# Altium PCB IMX6.PcbDoc
Units mil, origin at the board's own origin, x right, y up, seen from the top; angles counter-clockwise.
Board outline 7950 x 5550 mil, 2 copper layers (Top Layer, Bottom Layer), stack 12.8 mil thick; 102 components, 254 nets, 606 pads, 236 vias.
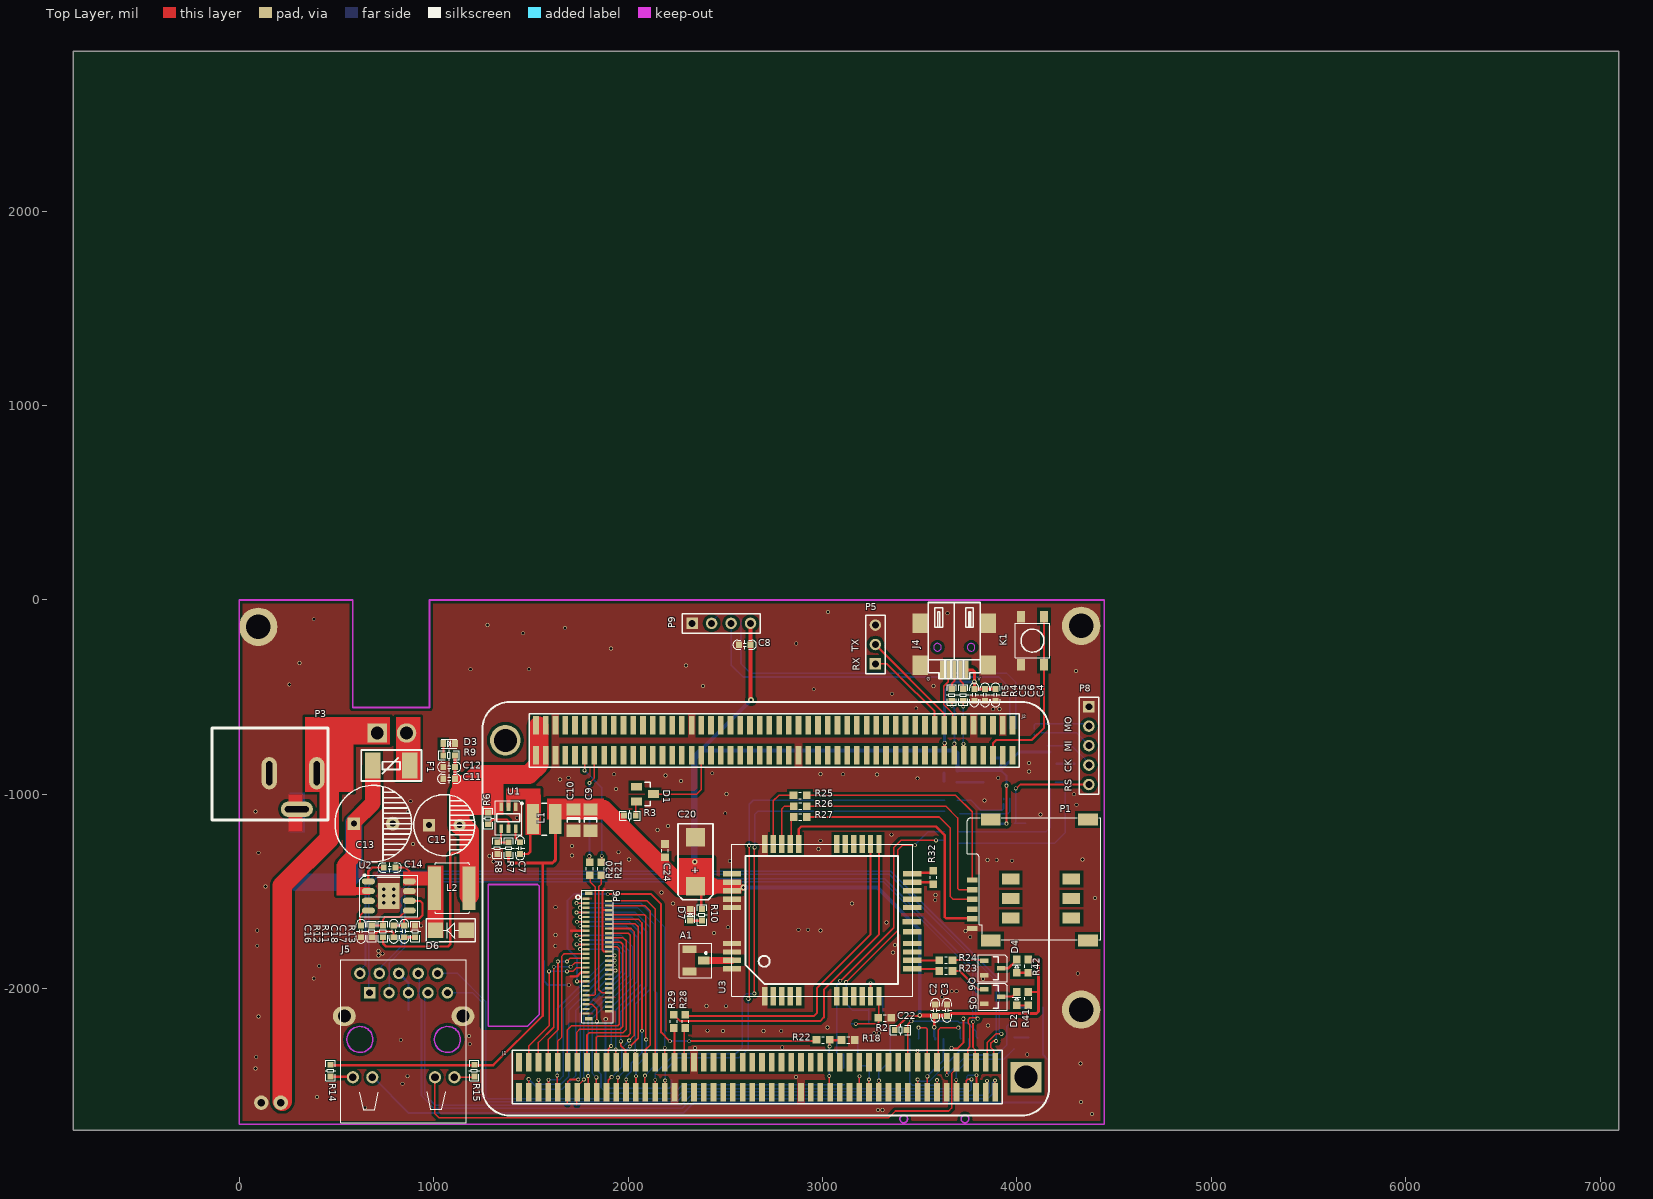
[diagram p0: Top Layer view]
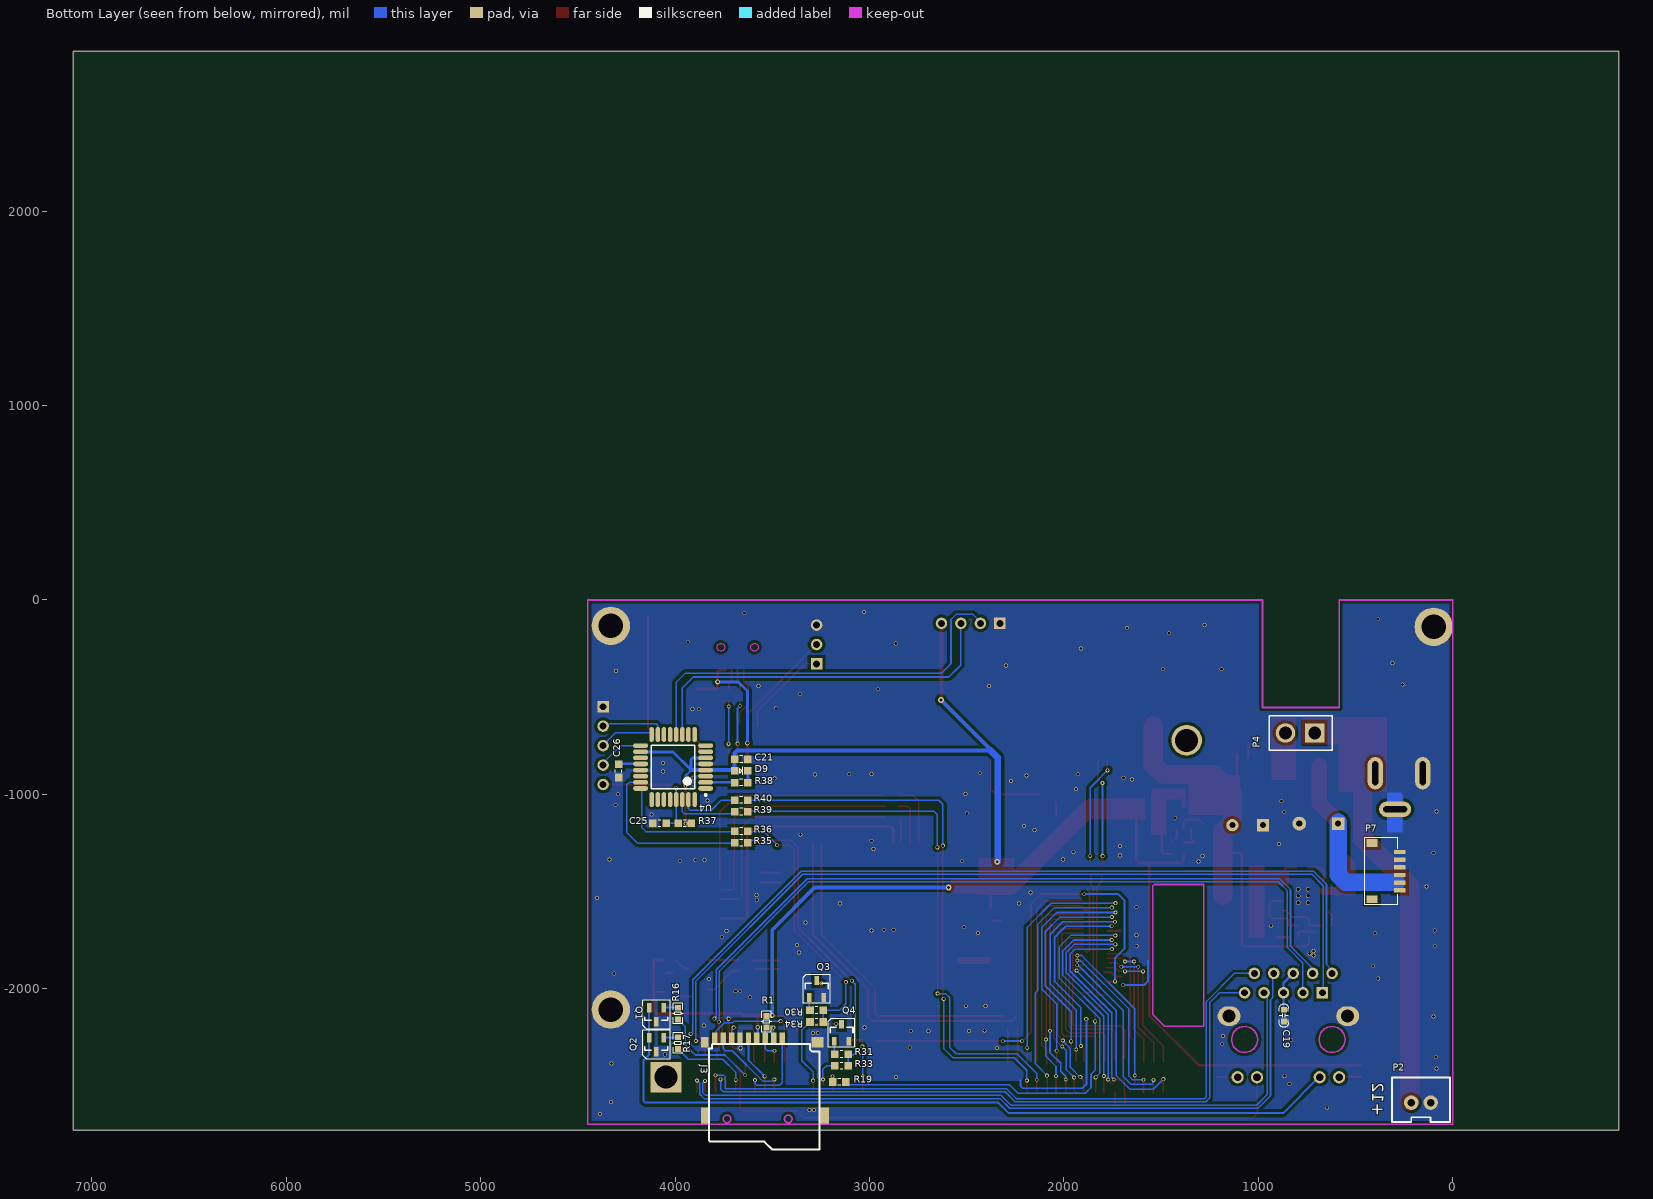
[diagram p1: Bottom Layer view, seen from below]

## Layer stack, top to bottom
Top Layer: signal copper 1.4
Dielectric: core 10, FR-4, Dk 4.2
Bottom Layer: signal copper 1.4

## Board outline
-854,2823 7096,2823 7096,-2727 -854,-2727

## Design rules (kind name [scope] priority, off if disabled: settings)
Clearance [All] p1 off: gap=15
ComponentClearance [All] p1 off: gap=0 collisioncheckmode=3 verticalgap=0
DiffPairsRouting [All] p1: maxlimit=10 minlimit=8 mostfreqgap=8 maxuncoupledlength=500
HoleSize [All] p1: absolutevalues=TRUE maxlimit=300 minlimit=1 maxpercent=80.000 minpercent=20.000
PlaneConnect [All] p1: planeconnectstyle=Direct reliefexpansion=20 reliefentries=4 reliefconductorwidth=12 reliefairgap=10
PolygonConnect [All] p1: connectstyle=Direct reliefconductorwidth=15 reliefentries=4 polygonreliefangle="90 Angle"
RoutingVias [All] p1: holewidth=12 width=20 viastyle="Through Hole" minholewidth=8 minwidth=16 maxholewidth=200 maxwidth=300
SolderMaskExpansion [All] p1: expansion=4
TestPointUsage FabricationTestPointUsage [All] p1: valid=0 allowmultiple=FALSE
Testpoint FabricationTestpoint [(IsPad And (OnTopLayer Or OnBottomLayer))] p1: side=3 testpointundercomponent=TRUE minsize=40 maxsize=100 preferedsize=60 minholesize=0 maxholesize=40 preferedholesize=32 testpointgrid=1 style=297 order=0123456789
Width [All] p1: maxlimit=200 minlimit=6 preferedwidth=10 minimp=50.000000 maximp=50.000000 favimp=50.000000
15 further rules are at their usual default settings.

## Classes and differential pairs
component class 9.RGB&TOUCH: P6 R18 R19 R20 R21 R22
component class 0.CONNECTOR: C2 C3 C4 C5 C6 D1 J1 J2 J3 J4 K1 R1 R2 R3 R4 R5 R33 R34
component class 1.POWER: C7 C8 C9 C10 C11 C12 C13 C14 C15 C16 C17 C18 C86 C87 C88 D3 D6 D7 F1 L1 L2 L11 P2 P3 P4 P7 R6 R7 R8 R9 R10 R11 R12 R13 R58 R59 U1 U2
component class 2.ETH: A1 C19 C20 C21 C22 C24 C25 C26 D2 D4 D9 J5 P1 P8 P9 Q1 Q2 Q3 Q4 Q5 Q6 R14 R15 R16 R17 R23 R24 R25 R26 R27 R28 R29 R30 R31 R32 R35 R36 R37 R38 R39 R40 R41 R42 U3 U4
component class 3.UART: C55 C56 D16 D17 D18 D19 D20 D21 P5
differential pair TRX0: +TRX0_P -TRX0_N
differential pair TRX1: +TRX1_P -TRX1_N
differential pair TRX2: +TRX2_P -TRX2_N
differential pair TRX3: +TRX3_P -TRX3_N
differential pair USB_OTG_D: +USB_OTG_D_P -USB_OTG_D_N

## Components (designator, comment, footprint, x,y, rotation, side; value= is the part's Value field where it differs from the comment)
A1 "IPEX" IPEX 2344,-1853 r0 top
C2 "22uF" 0603C 3580,-2110 r0 top
C3 "0.1uF" 0603C 3640,-2110 r0 top
C4 "0.1uF" 0603C 3890,-488 r180 top
C5 "22uF" 0603C 3781,-488 r180 top
C6 "22uF" 0603C 3836,-488 r180 top
C7 "0.1uF" 0603C 1445,-1276 r180 top
C8 "0.1uF" 0603C 2600,-230 r270 top
C9 "47uF" C1206 1807,-1132 r270 top
C10 "47uF" C1206 1719,-1132 r270 top
C11 "10uF" 0603C 1080,-919 r270 top
C12 "0.1uF" 0603C 1080,-859 r270 top
C13 "Cap Pol3" C10x5 790,-1150 r180 top
C14 "Cap" 0603C 774,-1376 r270 top
C15 "Cap Pol3" C8x4 1134,-1158 r180 top
C16 "Cap" 0603C 627,-1704 r0 top
C17 "Cap" 0603C 849,-1704 r180 top
C18 "Cap" 0603C 795,-1704 r180 top
C19 "0.1uF" 0603C 869,-2137 r180 bottom
C20 "Cap Pol3" C7343 2347,-1346 r90 top
C21 "Cap" 0603 3660,-819 r0 bottom
C22 "Cap" 0603 3320,-2149 r0 top
C24 "104" 0603 2190,-1289 r270 top
C25 "Cap" 0603 4080,-1149 r0 bottom
C26 "Cap" 0603 4290,-879 r270 bottom
D1 "BAT54C" SOT-23 2030,-1039 r180 top
D2 "WORK" 0603-LED 3999,-2050 r90 top
D3 "发光二极管" 0603D 1080,-739 r270 top
D4 "LINK" 0603-LED 3999,-1883 r90 top
D6 "SS54" SMA 1089,-1699 r180 top
D7 "发光二极管" 0603D 2320,-1619 r0 top
D9 "BLUE" 0603-LED 3660,-879 r180 bottom
F1 "Fuse Thermal" 1812F 878,-852 r180 top
J1 "CON50X2" IDC50X2-1.27MM_SMT 2664.2,-2453.94 r0 top locked
J2 "CON50X2" IDC50X2-1.27MM_SMT 2752,-721.66 r0 top locked
J3 "TF-CARD" TF-CARD 3507,-2327 r90 bottom
J4 "USB_AB" "MINI USB B" 3678,-357 r180 top
J5 "48F-01GY2DPL2NL" RJ45C-48F-01GY2DPL2NL 621,-1920 r0 top locked
K1 "KEY" SS-SPB-4.5 4080,-209 r90 top
L1 "3.3uH" L4030 1569,-1127 r180 top
L2 "Inductor" L-6045 1005,-1482 r0 top
P1 "MircoSIM" "Micro SIM" 4280,-1635 r90 top
P2 "Header 2" XH2.54-2P 214,-2585 r180 bottom
P3 "Header 2" DC005 155,-891 r0 top
P4 "Header 2" HDR1X2 721,-683 r0 bottom
P5 "Header 3" HDR1X3 3272,-329 r90 top
P6 "FPC-51PIN" FH26-51S-0.3SHW 1786,-1536 r90 top
P7 "DLP-PW" SH1.0-6P 273,-1493 r90 bottom
P8 "ISP" HDR1X5 4370,-549 r270 top
P9 "CSB" HDR1X4 2330,-120 r0 top locked
Q1 "9012" SOT-23-PMOS 4096,-2133 r270 bottom
Q2 "9012" SOT-23-PMOS 4096,-2287 r270 bottom
Q3 "NPN" SOT-23-NPN 3272,-2000 r180 bottom
Q4 "NPN" SOT-23-NPN 3144,-2226 r180 bottom
Q5 "NPN" SOT-23-NPN 3876,-2040 r270 top
Q6 "NPN" SOT-23-NPN 3876,-1893 r270 top
R1 "10K" 0603R 3530,-2169 r0 bottom
R2 "10K" 0603R 3402,-2211 r270 top
R3 "10K" 0603R 2010,-1109 r270 top
R4 "33R" 0603R 3724,-488 r0 top
R5 "33R" 0603R 3665,-488 r0 top
R6 "10K" 0603R 1281,-1123 r0 top
R7 "33K" 0603R 1386,-1276 r180 top
R8 "10K" 0603R 1328,-1276 r180 top
R9 "Res1" 0603R 1080,-799 r270 top
R10 "1K" 0603R 2380,-1619 r180 top
R11 "Res Semi" 0603R 740,-1704 r0 top
R12 "Res Semi" 0603R 682,-1704 r180 top
R13 "Res Semi" 0603R 905,-1704 r0 top
R14 "1K" 0603R 470,-2420 r180 top
R15 "1K" 0603R 1210,-2420 r180 top
R16 "4.7K" 0603R 3985,-2127 r180 bottom
R17 "4.7K" 0603R 3985,-2279 r180 bottom
R18 "47R" 0603 3003,-2262 r180 top
R19 "47R" 0603 3156,-2479 r180 bottom
R20 "47R" 0603 1803,-1382 r270 top
R21 "47R" 0603 1862,-1382 r270 top
R22 "100K" 0603 3132,-2263 r180 top
R23 "Res1" 0603 3635,-1908 r0 top
R24 "Res1" 0603 3635,-1852 r0 top
R25 "Res1" 0603 2885,-1005 r180 top
R26 "Res1" 0603 2886,-1060 r180 top
R27 "Res1" 0603 2886,-1116 r180 top
R28 "Res1" 0603 2295,-2167 r270 top
R29 "Res1" 0603 2235,-2167 r270 top
R30 "Res1" 0603 3272,-2110 r180 bottom
R31 "Res1" 0603 3144,-2336 r180 bottom
R32 "Res1" 0603 3570,-1427 r270 top
R33 "Res1" 0603 3144,-2396 r180 bottom
R34 "Res1" 0603 3272,-2170 r180 bottom
R35 "Res1" 0603 3660,-1249 r0 bottom
R36 "Res1" 0603 3660,-1189 r0 bottom
R37 "Res1" 0603 3950,-1149 r180 bottom
R38 "1K" 0603 3660,-939 r180 bottom
R39 "Res1" 0603 3660,-1089 r180 bottom
R40 "Res1" 0603 3660,-1029 r180 bottom
R41 "Res1" 0603 4058,-2050 r270 top
R42 "Res1" 0603 4058,-1883 r270 top
U1 "TPS562201" SOT23-6-DC 1385,-1120 r270 top
U2 "TPS54331" SOP8-POW 770,-1522 r0 top
U3 "G3524" G3524 2763,-1623 r90 top
U4 "ATmega48PA" 32A_M 4010,-859 r0 bottom

## Footprints (in the part's own frame and the unit in brackets; to place one, negate y for a bottom-side part, rotate by r counter-clockwise, add the part's x,y. Pads: shape width x height; smd on the part's side, far side on the other; paste and mask are expansions set on the pad)
32A_M [mm] "32-Pin Thin Quad Flat Pack 0.8 mm Pitch, IPC Low Density"
  oval 1.95x0.6 smd: 1(-4.25,2.8) 2(-4.25,2) 3(-4.25,1.2) 4(-4.25,0.4) 5(-4.25,-0.4) 6(-4.25,-1.2) 7(-4.25,-2) 8(-4.25,-2.8) 17(4.25,-2.8) 18(4.25,-2) 19(4.25,-1.2) 20(4.25,-0.4) 21(4.25,0.4) 22(4.25,1.2) 23(4.25,2) 24(4.25,2.8)
  oval 0.6x1.95 smd: 9(-2.8,-4.25) 10(-2,-4.25) 11(-1.2,-4.25) 12(-0.4,-4.25) 13(0.4,-4.25) 14(1.2,-4.25) 15(2,-4.25) 16(2.8,-4.25) 25(2.8,4.25) 26(2,4.25) 27(1.2,4.25) 28(0.4,4.25) 29(-0.4,4.25) 30(-1.2,4.25) 31(-2,4.25) 32(-2.8,4.25)
  silkscreen extent -4.37,-2.85 2.85,3.77, body extent -3.5,-3.5 3.5,3.5, height 1.2
0603 [mm]
  rect 1x1 smd: 1(-0.864,0) 2(0.864,0)
  silkscreen extent -0.18,-0.43 0.18,0.43
0603-LED [mm]
  rect 1x1 smd: 1(-0.864,0) 2(0.864,0)
  silkscreen extent -0.18,-0.51 0.18,0.56
0603C [mil]
  rect 31.5x30 smd: 1(0,30) 2(0,-30)
  silkscreen extent -24,-60 24,60
0603D [mil]
  rect 35.43x30 smd: A(0,-30) K(0,30)
  silkscreen extent -24,-40 24,39
0603R [mil]
  rect 31.5x30 smd: 1(0,30) 2(0,-30)
  silkscreen extent -28,-53 28,53
1812F [mm]
  rect 2x3.4 smd: 1(0,0) 2(4.85,0)
  silkscreen extent -1.5,-2.03 6.35,2.03
C8x4 [mm]
  round 1.6 hole 0.8: 1(0,0)
  rect 1.6x1.6 hole 0.8: 2(4,0)
  silkscreen extent -2,-4 6,4
C10x5 [mm]
  round 1.8 hole 0.8: 1(0,0)
  rect 1.651x1.651 hole 0.8: 2(5.08,0)
  silkscreen extent -2.46,-5 7.54,5
C1206 [mm] "Chip Capacitor; Body 3.2 x 1.6 mm (LxW typ)"
  rect 1.6x1.8 smd: 1(-1.4,0) 2(1.4,0)
  silkscreen extent -0.3,-0.8 0.3,0.8
C7343 [mm] "Molded Capacitor, 2-Leads, Body 7.3x4.3mm, IPC Medium Density"
  rect 2.45x2.5 smd: 1(-3.2,0) 2(3.2,0)
  silkscreen extent -4.95,-2.29 4.95,2.29, body extent -3.75,-2.25 3.75,2.25, height 4.3
DC005 [mm]
  oval 2x4.2 hole 0.8 slot 3.1 at 90 deg: 1(6.2,0) 2(0,0)
  oval 4.2x2 hole 0.8 slot 3.1 at 0 deg: 3(3.6,-4.7)
  silkscreen extent -7.49,-6.1 7.7,5.89
FH26-51S-0.3SHW [mm]
  rect 0.45x1 smd: 0(-15.7,-0.3) 0(0.7,-0.3)
  rect 0.3x0.95 smd: 1(0,0.05) 2(-0.3,-2.91) 3(-0.6,0.05) 4(-0.9,-2.91) 5(-1.2,0.05) 6(-1.5,-2.91) 7(-1.8,0.05) 8(-2.1,-2.91) 9(-2.4,0.05) 10(-2.7,-2.91) 11(-3,0.05) 12(-3.3,-2.91) 13(-3.6,0.05) 14(-3.9,-2.91) 15(-4.2,0.05) 16(-4.5,-2.91) 17(-4.8,0.05) 18(-5.1,-2.91) 19(-5.4,0.05) 20(-5.7,-2.91) 21(-6,0.05) 22(-6.3,-2.91) 23(-6.6,0.05) 24(-6.9,-2.91) 25(-7.2,0.05) 26(-7.5,-2.91) 27(-7.8,0.05) 28(-8.1,-2.91) 29(-8.4,0.05) 30(-8.7,-2.91) 31(-9,0.05) 32(-9.3,-2.91) 33(-9.6,0.05) 34(-9.9,-2.91) 35(-10.2,0.05) 36(-10.5,-2.91) 37(-10.8,0.05) 38(-11.1,-2.91) 39(-11.4,0.05) 40(-11.7,-2.91) 41(-12,0.05) 42(-12.3,-2.91) 43(-12.6,0.05) 44(-12.9,-2.91) 45(-13.2,0.05) 46(-13.5,-2.91) 47(-13.8,0.05) 48(-14.1,-2.91) 49(-14.4,0.05) 50(-14.7,-2.91) 51(-15,0.05)
  silkscreen extent -16.2,-3.5 1.1,1.38
G3524 [mm]
  rect 2.4x0.7 smd: 1(-10.55,1.5) 2(-10.55,0.4) 3(-10.55,-0.7) 4(-10.55,-1.8) 5(-10.55,-2.9) 6(-10.55,-7.9) 7(-10.55,-9) 8(-10.55,-10.1) 9(-10.55,-11.2) 10(-10.55,-12.3) 11(-10.55,-13.4) 21(9.35,-13.4) 22(9.35,-12.3) 23(9.35,-11.2) 24(9.35,-10.1) 25(9.35,-9) 26(9.35,-7.9) 27(9.35,-2.9) 28(9.35,-1.8) 29(9.35,-0.7) 30(9.35,0.4) 31(9.35,1.5)
  rect 0.7x2.4 smd: 12(-6.95,-17.75) 13(-5.85,-17.75) 14(-4.75,-17.75) 15(-3.65,-17.75) 16(1.05,-17.75) 17(2.15,-17.75) 18(3.25,-17.75) 19(4.35,-17.75) 20(5.45,-17.75) 32(5.45,5.8) 33(4.35,5.8) 34(3.25,5.8) 35(2.15,5.8) 36(1.05,5.8) 37(-3.65,5.8) 38(-4.75,5.8) 39(-5.85,5.8) 40(-6.95,5.8) 41(-2.1,-17.75) 42(-0.8,-17.7)
  silkscreen extent -10.55,-17.8 9.35,5.8
HDR1X2 [mil] "Connector; Header; 2 Position"
  rect 100x100 hole 65: 1(-10,1)
  round 100 hole 65: 2(140,1)
  silkscreen extent -100,-88 224,89
HDR1X3 [mm] "Connector; Header; 3 Position"
  rect 1.5x1.5 hole 0.9: 1(0,0)
  round 1.5 hole 0.9: 2(2.54,0) 3(5.08,0)
  silkscreen extent -1.27,-1.27 6.35,1.27
HDR1X4 [mm] "Connector; Header; 4 Position"
  rect 1.5x1.5 hole 0.9: 1(0,0)
  round 1.5 hole 0.9: 2(2.54,0) 3(5.08,0) 4(7.62,0)
  silkscreen extent -1.27,-1.27 8.89,1.27
HDR1X5 [mm] "Connector; Header; 5 Position"
  rect 1.5x1.5 hole 0.9: 1(0,0)
  round 1.5 hole 0.9: 2(2.54,0) 3(5.08,0) 4(7.62,0) 5(10.16,0)
  silkscreen extent -1.27,-1.27 11.43,1.27
IDC50X2-1.27MM_SMT [mm]
  rect 0.74x2.4 smd: 1(-31.115,-1.95) 2(-31.115,1.95) 3(-29.845,-1.95) 4(-29.845,1.95) 5(-28.575,-1.95) 6(-28.575,1.95) 7(-27.305,-1.95) 8(-27.305,1.95) 9(-26.035,-1.95) 10(-26.035,1.95) 11(-24.765,-1.95) 12(-24.765,1.95) 13(-23.495,-1.95) 14(-23.495,1.95) 15(-22.225,-1.95) 16(-22.225,1.95) 17(-20.955,-1.95) 18(-20.955,1.95) 19(-19.685,-1.95) 20(-19.685,1.95) 21(-18.415,-1.95) 22(-18.415,1.95) 23(-17.145,-1.95) 24(-17.145,1.95) 25(-15.875,-1.95) 26(-15.875,1.95) 27(-14.605,-1.95) 28(-14.605,1.95) 29(-13.335,-1.95) 30(-13.335,1.95) 31(-12.065,-1.95) 32(-12.065,1.95) 33(-10.795,-1.95) 34(-10.795,1.95) 35(-9.525,-1.95) 36(-9.525,1.95) 37(-8.255,-1.95) 38(-8.255,1.95) 39(-6.985,-1.95) 40(-6.985,1.95) 41(-5.715,-1.95) 42(-5.715,1.95) 43(-4.445,-1.95) 44(-4.445,1.95) 45(-3.175,-1.95) 46(-3.175,1.95) 47(-1.905,-1.95) 48(-1.905,1.95) 49(-0.635,-1.95) 50(-0.635,1.95) 51(0.635,-1.95) 52(0.635,1.95) 53(1.905,-1.95) 54(1.905,1.95) 55(3.175,-1.95) 56(3.175,1.95) 57(4.445,-1.95) 58(4.445,1.95) 59(5.715,-1.95) 60(5.715,1.95) 61(6.985,-1.95) 62(6.985,1.95) 63(8.255,-1.95) 64(8.255,1.95) 65(9.525,-1.95) 66(9.525,1.95) 67(10.795,-1.95) 68(10.795,1.95) 69(12.065,-1.95) 70(12.065,1.95) 71(13.335,-1.95) 72(13.335,1.95) 73(14.605,-1.95) 74(14.605,1.95) 75(15.875,-1.95) 76(15.875,1.95) 77(17.145,-1.95) 78(17.145,1.95) 79(18.415,-1.95) 80(18.415,1.95) 81(19.685,-1.95) 82(19.685,1.95) 83(20.955,-1.95) 84(20.955,1.95) 85(22.225,-1.95) 86(22.225,1.95) 87(23.495,-1.95) 88(23.495,1.95) 89(24.765,-1.95) 90(24.765,1.95) 91(26.035,-1.95) 92(26.035,1.95) 93(27.305,-1.95) 94(27.305,1.95) 95(28.575,-1.95) 96(28.575,1.95) 97(29.845,-1.95) 98(29.845,1.95) 99(31.115,-1.95) 100(31.115,1.95)
  silkscreen extent -32,-3.5 32,3.5
IPEX [mil] "SOT23, 3-Leads, Body 3.0x2.6mm (max), Pitch 0.95mm, IPC Medium Density"
  rect 59.06x41.34 smd: 1(46.5,-0.5)
  rect 70.87x39.37 smd: 2(-28.5,57.5) 3(-28.5,-57.5)
  silkscreen extent -80,-88 86,88
L4030 [mm]
  rect 1.6x3.9 smd: 1(-1.45,0) 2(1.45,0)
  silkscreen extent -0.35,-2.1 0.35,2.1
L-6045 [mm]
  rect 1.7x5.7 smd: 1(0,0) 2(4.5,0)
  silkscreen extent 0,-3.3 4.57,3.3
"Micro SIM" [mm]
  rect 1.55x2.6 smd: 0(-2.95,10.53) 0(-2.95,-2.15) 0(12.85,10.53) 0(12.85,-2.15)
  rect 1.4x2.3 smd: 0(0,7.92) 0(0,0) 0(2.54,7.92) 0(2.54,0) 0(5.08,7.92) 0(5.08,0)
  rect 0.7x1.35 smd: 1(-0.12,12.955) 2(2.42,12.955) 3(4.96,12.955) 5(-1.39,12.955) 6(1.15,12.955) 7(3.69,12.955)
  silkscreen extent -2.82,-3.82 13.05,13.58
"MINI USB B" [mm]
  rect 0.5x2.3 smd: 1(-1.6,0) 2(-0.8,0) 3(0,0) 4(0.8,0) 5(1.6,0)
  rect 2x2.5 smd: 6(4.45,-6.038) 7(4.45,-0.538) 8(-4.45,-0.554) 9(-4.45,-6.038)
  Keep-Out Layer circle w0.1: c2.2,-2.893 r0.5
  Keep-Out Layer circle w0.1: c-2.2,-2.893 r0.5
  silkscreen extent -3.4,-8.74 3.4,1.22, body extent -5.32,-8.77 5.38,0.43, height 3.95
RJ45C-48F-01GY2DPL2NL [mm]
  round 1.5 hole 0.9: 1(0,0) 3(2.54,0) 4(3.81,-2.54) 5(5.08,0) 6(6.35,-2.54) 7(7.62,0) 8(8.89,-2.54) 9(10.16,0) 10(11.43,-2.54)
  rect 1.5x1.5 hole 0.9: 2(1.27,-2.54)
  round 1.6 hole 1: 11(-0.915,-13.565) 12(1.625,-13.565) 13(9.805,-13.565) 14(12.345,-13.565)
  oval 3x2.54 hole 1.7: 15(-2.035,-5.59) 16(13.465,-5.59)
  Keep-Out Layer circle w0.178: c0,-8.64 r1.7
  Keep-Out Layer circle w0.178: c11.43,-8.64 r1.7
  silkscreen extent -2.48,-19.54 13.92,1.77
SH1.0-6P [mm]
  rect 1x1.5 smd: 0(-1.175,3.63) 0(6.175,3.63)
  rect 0.55x1.55 smd: 1(0,0) 2(1,0) 3(2,0) 4(3,0) 5(4,0) 6(5,0)
  silkscreen extent -1.88,0.25 6.88,4.57
SMA [mm]
  rect 2x2 smd: A(-2,0) K(2,0)
  silkscreen extent -3.2,-1.5 3.2,1.5
SOP8-POW [mm]
  oval 1.7x0.8 smd: 1(-2.675,1.905) 2(-2.675,0.635) 3(-2.675,-0.635) 4(-2.675,-1.905) 5(2.675,-1.905) 6(2.675,-0.635) 7(2.675,0.635) 8(2.675,1.905)
  rect 2.8x3.4 smd: 9(0,0)
  silkscreen extent -3.78,-2.7 3.77,2.82
SOT23-6-DC [mm]
  rect 1.1x0.5 smd: 1(-1.45,0.95) 2(-1.45,0) 3(-1.45,-0.95) 4(1.45,-0.95) 5(1.45,0) 6(1.45,0.95)
  silkscreen extent -2.25,-1.75 2.25,1.88, body extent -0.87,-1.5 0.87,1.5, height 1.1
SOT-23 [mil]
  rect 55x40 smd: 1(-14.05,-78.06) 2(-14.05,-2.06) 3(-101.05,-41.06)
  silkscreen extent -85,-101 -56,20
SOT-23-NPN [mm]
  rect 0.6x1.143 smd: 1(0.95,-1.108) 2(-0.95,-1.108) 3(0,1.108)
  silkscreen extent -1.75,-1.89 1.75,1.87, body extent -1.5,-0.66 1.5,0.74, height 1.1
SOT-23-PMOS [mm]
  rect 1.25x0.6 smd: 1(-0.925,0.95) 2(-0.925,-0.95) 3(0.925,0)
  silkscreen extent -1.91,-1.78 1.91,1.78, body extent -0.7,-1.5 0.7,1.5, height 1.1
SS-SPB-4.5 [mm]
  rect 1.5x1 smd: 1(-3.15,1.5) 2(3.15,1.5) 3(3.15,-1.5) 4(-3.15,-1.5)
  silkscreen extent -2.25,-2.25 2.25,2.25
TF-CARD [mm]
  rect 1.6x0.7 smd: 1(1.82,-1.466) 2(1.82,-0.366) 3(1.82,0.734) 4(1.82,1.834) 5(1.82,2.934) 6(1.82,4.034) 7(1.82,5.134) 8(1.82,6.234) 9(1.82,7.334)
  rect 1.4x1 smd: 10(1.32,8.634)
  rect 2.2x1.2 smd: 11(-8.28,8.534) 12(-8.28,-6.966)
  rect 1.4x1.6 smd: 13(1.32,-6.066)
  Keep-Out Layer circle w0.203: c-8.68,5.734 r0.5
  Keep-Out Layer circle w0.203: c-8.68,-2.266 r0.5
  silkscreen extent -12.7,-6.37 1.12,8.13
XH2.54-2P [mm]
  round 1.9 hole 0.95 paste+0: 1(0,0)
  round 1.9 hole 0.95: 2(2.54,0)
  silkscreen extent -2.54,-2.54 5.08,3.3

## Part data
C2 C3 C4 C5 C6 C7 C8 C9 C10 C11 C12 C19: library part 电容, "电容"
C13 C15 C20: "Polarized Capacitor (Surface Mount)"
C14 C16 C17 C18 C21 C22 C25 C26: "Capacitor"
C24: library part CAP
D1: "SCHOTTKY DIODE"
D2 D4 D9: library part LED2, "Typical RED, GREEN, YELLOW, AMBER GaAs LED"
D6: library part SS24
F1: "Thermal Fuse"
J1 J2: "ASTRON B2B Connector"
J4: "小USB插痤"
K1: library part 按键, "按键"
L1: library part 功率电感
P2 P3 P4: "Header, 2-Pin"
P5: "Header, 3-Pin"
P7: library part "Header 6", "Header, 6-Pin"
P8: library part "Header 5", "Header, 5-Pin"
P9: library part "Header 4", "Header, 4-Pin"
Q3 Q4 Q5 Q6: library part 2N5551, "NPN General Purpose Amplifier"
R1 R2 R3 R4 R5 R6 R7 R8 R10 R14 R15 R16 R17: library part 电阻, "电阻"
R9 R23 R24 R25 R26 R27 R28 R29 R30 R31 R32 R33 R34 R35 R36 R37 R39 R40 R41 R42: "Resistor"
R11 R12 R13: "Semiconductor Resistor"
R18 R19 R20 R21 R22 R38: library part Res1, "Resistor"
U4: library part ATmega8-16AC, "8-Bit AVR Microcontroller with 8K Bytes of In-System Programmable Flash Memory"

## Free pads (board coordinates)
  round 157.48 hole 118.11: 0(1369.52,-721.66)
  rect 157.48x157.48 hole 118.11: 0(4046.69,-2453.94)
  round 196.85 hole 125.98: 1(4330.71,-2106.45) 1(4330.71,-133) 2(98.42,-137.95)

## Via types
v1: diameter 20, hole 15, Top Layer to Bottom Layer, 128 vias
v2: diameter 20, hole 12, Top Layer to Bottom Layer, 87 vias
v3: diameter 22, hole 18, Top Layer to Bottom Layer, 6 vias
v4: diameter 19, hole 12, Top Layer to Bottom Layer, 3 vias
v5: diameter 22, hole 13, Top Layer to Bottom Layer, 2 vias
v6: diameter 25, hole 14, Top Layer to Bottom Layer, 2 vias
v7: diameter 30, hole 15, Top Layer to Bottom Layer, 2 vias
v8: diameter 19, hole 11, Top Layer to Bottom Layer, 1 vias
v9: diameter 20, hole 11, Top Layer to Bottom Layer, 1 vias
v10: diameter 22, hole 15, Top Layer to Bottom Layer, 1 vias
v11: diameter 30, hole 16, Top Layer to Bottom Layer, 1 vias
v12: diameter 23, hole 13, Top Layer to Bottom Layer, 1 vias
v13: diameter 24, hole 14, Top Layer to Bottom Layer, 1 vias

## Nets (pads, with @x,y where several pads share a name; then routed paths per layer and width w, separated by ;. In a path a pad name is that pad's centre, name@x,y a point inside that pad or via, vN(x,y) a via of type N, cw(c..) or ccw(c..) an arc to the next point about the centre after c; other vN are vias at no path point)
+3.3V: C2.2 C3.2 C8.1 C9.1 C10.1 C20.1 C21.2 C24.2 D9.1 J3.4 L1.1 P9.4 R1.2 R2.2 R3.2 R7.1 R10.2 R14.2 R15.2 R37.2 R41.1 R42.1 U3.33 U3.34 U4.4 U4.6 U4.18 | length 9745.4
  Top Layer w12: R14.2@470,-2392 1307,-2392 1561,-2138 1561,-1354 ; R10.2@2377,-1582.76 C20.1@2377,-1509 ; R2.2@3372,-2214 3372,-2208 3441,-2139 v6@3501,-2139 ; C3.2@3645,-2138 C3.2@3649,-2142 ; v2(3946,-1150) v2(3946,-955) ; R41.1@4054,-2016 4110,-2016
  Top Layer w15: R7.1 1386,-1343 1396,-1353 1611,-1353 1626.09,-1337.91 L1.1 ; v12@3575,-2198.76 C2.2@3575,-2153 ; C3.2@3649,-2138 3660,-2127 4101,-2127 4111,-2117 4111,-1857 4105,-1851 R42.1@4060,-1851
  Top Layer w18: 2566,-1477 v11@2594,-1477
  Top Layer w20: P9.4@2630,-124 2630,-513 v7@2632,-513 ; v6@3502,-2136 C3.2@3645,-2136
  Top Layer w90: C9.1@1825,-1072.88 1874.88,-1072.88 2275,-1473 2433,-1473
  Bottom Layer w12: v6@3500,-2135 R1.2@3528,-2135 ; R37.2@3916,-1150 v2@3947,-1150 ; 3922.5,-880.5 3946,-904 v2(3946,-955)
  Bottom Layer w15: J3.4@3575,-2241.78 v12@3575,-2200 ; J3.4@3579.93,-2255.35 J3.4@3580,-2259 ; U4.6@3866,-813 3910,-813 3919,-822 3919,-873 ; 3917,-875 4011,-781 U4.18@4170,-781
  Bottom Layer w20: 2378,-775 3682,-775 3693,-786 3694,-786 D9.1@3694,-878 ; 2378,-773 2378,-769 v7(2633,-514) ; v11(2593,-1478) 3282,-1478 3500,-1696 v6(3500,-2136) ; D9.1@3701,-875 3917,-875
  Bottom Layer w35: v7@2341,-1346 2341,-810 2378,-773
  other v7: 2343,-1346
  other v12: 3575,-2197
+12V: C13.2 F1.2 P7.1 P7.2 P7.3 U2.2 | length 1331.5
  Top Layer w40: 592,-1497 U2.2
  Top Layer w80: 543,-1467 543,-1364 589,-1318 589,-1143 687.06,-1044.94 F1.2
  Bottom Layer w90: P7.2@290,-1451 550,-1451 589,-1412 C13.2@589,-1143
AUGND: A1.2 A1.3 C2.1 C3.1 C4.1 C5.1 C6.1 C8.2 C9.2 C10.2 C11.2 C12.2 C13.1 C15.2 C16.2 C18.1 C19.2 C20.2 C21.1 C22.2 C24.1 C25.2 C26.2 D3.K D6.A D7.K J1.33 J1.38 J1.59 J1.89 J2.5 J2.6 J2.34 J2.55 J2.92 J2.98 J3.6 J3.10 J3.11 J3.12 J3.13 J4.5 J4.6 J4.7 J4.8 J4.9 J5.15 J5.16 K1.1 K1.2 P1.5 P2.2 P3.2 P3.3 P5.3 P6.1 P6.6 P6.15 P6.24 P6.33 P6.44 P6.50 P6.51 P7.4 P7.5 P7.6 P8.1 P9.1 pad.1 pad.2 Q1.3 Q2.3 Q3.1 Q4.1 Q5.1 Q6.1 R8.1 R12.1 R13.1 R22.1 U1.1 U2.7 U2.9 U3.1 U3.31 U3.35 U3.36 U3.37 U3.38 U3.40 U4.3 U4.5 U4.21 | length 1805.1
  Top Layer w10: 704,-1713 712,-1705 789,-1705 795,-1711 C18.1 ; 1871,-1595.06 P6.6 ; 1880,-1487 1869,-1498 1869,-1801 1876,-1808 P6.24@1892,-1808 ; v10@3662,-2306 3695,-2306 3725,-2276 v5(3725,-2153)
  Top Layer w12: 1706,-1936 1736,-1936 1758,-1914 P6.33@1790,-1914 ; 1708,-1701 P6.15@1773,-1701
  Bottom Layer w10: 1568,-1856 1568,-1961 1587,-1980 v1@1694,-1980 ; v5@1885,-2157 1885,-2491 1905,-2511 2212,-2511 2223,-2500 2223,-2469
  other v1: 4387,-2643 3285,-2622 3309,-2622 647,-2611 4329,-2581 401,-2555 840,-2488 2863,-2453 865,-2449 85,-2410 4326,-2384 88,-2351 4053,-2338 2344,-2304 2793,-2301 1186,-2284 831,-2262 1183,-2242 3266,-2227 3290,-2227 2488,-2217 2696,-2217 2788,-2217 2408,-2215 3025,-2198 3851,-2188 99,-2141 2504,-2089 2404,-2088 3615,-2043 3665,-2012 3689,-2012 1695,-1979 3826,-1949 384,-1946 4313,-1921 412,-1882 716,-1829 737,-1819 3362,-1812 717,-1806 1626,-1780 93,-1778 3372,-1774 3760,-1733 1628,-1723 401,-1714 2443,-1713 3736,-1703 93,-1700 2990,-1700 2876,-1696 2926,-1696 2515,-1683 936,-1675 3330,-1659 1628,-1580 2231,-1561 3151,-1560 3580,-1543 4401,-1532 3582,-1517 2173,-1505 135,-1474 1309,-1345 2523,-1343 3974,-1341 3896,-1338 3849,-1337 2006,-1335 4337,-1335 1287,-1316 1712,-1313 99,-1300 1952,-1297 2979,-1280 1712,-1265 895,-1255 2990,-1238 3355,-1207 2152,-1183 2206,-1162 1428,-1120 4122,-1103 2500,-1097 867,-1090 85,-1088 4306,-1053 881,-1035 3834,-1032 4294,-999 2506,-998 1939,-973 2273,-931 1651,-923 3489,-917 3904,-916 1693,-914 2193,-902 3281,-898 1927,-896 3105,-896 2990,-894 2433,-891 4062,-882 4063,-838 3876,-562 3911,-560 3482,-557 3358,-482 2955,-459 3570,-443 2385,-442 258,-434 4303,-365 1189,-356 1491,-356 2299,-337 311,-325 1913,-250 2865,-223 3935,-215 1460,-171 1675,-143 1278,-129 384,-99 3643,-68 3028,-61
  other v3: 745,-1557 795,-1557 745,-1522 795,-1522 745,-1487 795,-1487
  other v5: 1885,-2155
  other v10: 3663,-2305
BAT_RTC: J2.94
CAN1_RX: J2.12
CAN1_TX: J2.10
CAN2_RX: J2.7
CAN2_TX: J2.9
CCM_CLKO2: J2.36
CLK1_N: J2.83
CLK1_P: J2.81
CSB_CS: P9.3 U4.11 | length 1901
  Bottom Layer w8: P9.3@2531,-124 2531,-335 2592,-396 3907,-396 3962,-451 U4.11@3962,-662
CSB_SIG: P9.2 U4.12 | length 2099.7
  Bottom Layer w8: P9.2@2429,-113 2468,-74 2555,-74 2581,-100 2581,-328 2629,-376 3947,-376 3995,-424 U4.12@3995,-663
CSI0_HSYNCH: J2.37
CSI0_PIXCLK: J2.38
CSI_CLK0_N: J2.61
CSI_CLK0_P: J2.63
CSI_D0_N: J2.71
CSI_D0_P: J2.69
CSI_D1_N: J2.67
CSI_D1_P: J2.65
DISP0_CLK: J1.32 P6.3 | length 1249.8
  Top Layer w8: v2@1734,-1559.62 P6.3 ; J1.32@2189,-2376.97 v2(2189,-2303)
  Bottom Layer w8: v2(1735,-1559) 2065,-1559 2190,-1684 v2@2190,-2303
DISP0_CNTRST: J1.2
DISP0_DAT0: J1.26 P6.7 | length 1184.3
  Top Layer w8: v2(1735,-1607) 1783.9,-1607 P6.7 ; J1.26@2038,-2375.97 v2(2038,-2318)
  Bottom Layer w8: v2(1735,-1607) 2037,-1607 2115,-1685 2115,-1999 2038,-2076 v2(2038,-2318)
DISP0_DAT1: J1.25 P6.8 | length 1117.3
  Top Layer w8: P6.8 2083.68,-1618.68 2092,-1627 v2@2092,-2259 ; J1.25@2041,-2528.92 v2(2041,-2449)
  Bottom Layer w8: v2(2041,-2449) 2041,-2399 2093,-2347 v2(2093,-2260)
DISP0_DAT2: J1.24 P6.9 | length 1124.9
  Top Layer w8: v2(1754,-1630.67) P6.9@1771.71,-1630.67 ; v2(1963,-2270) 1963,-2292 1987,-2316 J1.24@1987,-2374.97
  Bottom Layer w8: v2(1754,-1630.67) 2020.67,-1630.67 2096,-1706 2096,-1984 1963,-2117 v2(1963,-2270)
DISP0_DAT3: J1.23 P6.10 | length 1082.7
  Top Layer w8: P6.10 2053.3,-1642.3 2072,-1661 v8@2072,-2214 ; J1.23@1991,-2533.92 v9@1991,-2468
  Bottom Layer w8: v9(1991,-2466) 1991,-2449 2017,-2423 2017,-2383 2072,-2328 v8(2072,-2215)
DISP0_DAT4: J1.22 P6.11 | length 1102.7
  Top Layer w8: v2(1737.35,-1654.67) P6.11@1769.71,-1654.67 ; J1.22@1937,-2374.97 v2(1937,-2312)
  Bottom Layer w8: v2(1737.35,-1654.67) 2005.67,-1654.67 2070,-1719 2070,-1975 1937,-2108 v2(1937,-2312)
DISP0_DAT5: J1.21 P6.12 | length 1054.6
  Top Layer w8: P6.12 2036.92,-1665.92 2052,-1681 2052,-2254 v2@2009,-2297 ; J1.21@1940,-2529.92 1948,-2521.92 v2(1948,-2456)
  Bottom Layer w8: v2@1947,-2455 1949,-2455 1989,-2415 1989,-2316 v2(2009,-2296)
DISP0_DAT6: J1.20 P6.13 | length 1043.7
  Top Layer w8: v2@1754,-1677.67 v2(1755,-1677.67) P6.13@1773.09,-1677.67 ; J1.20@1889,-2376.97 1899,-2366.97 1899,-2308 v2(1913,-2294)
  Bottom Layer w8: v2(1755,-1677.67) 1990.67,-1677.67 2048,-1735 2048,-1962 1913,-2097 v2(1913,-2294)
DISP0_DAT7: J1.19 P6.14 | length 1015.9
  Top Layer w8: J1.19@1898.5,-2529.42 1898.5,-2469.5 1914,-2454 v2(1916,-2454) ; P6.14 2015.54,-1689.54 2031,-1705 2031,-2240 v2(2006,-2265)
  Bottom Layer w8: v2@1917,-2453 1967,-2403 1967,-2306 2006,-2267 v2(2006,-2265)
DISP0_DAT8: J1.18 P6.16 | length 928.2
  Top Layer w8: J1.18@1837,-2373 1837,-2249 1843,-2243 1998,-2243 2012,-2229 2012,-1724 2001.16,-1713.16 P6.16
DISP0_DAT9: J1.17 P6.17 | length 1185.4
  Top Layer w8: v2@1738.35,-1725.67 P6.17@1770.71,-1725.67 ; J1.17@1837,-2528.51 v2(1837,-2455)
  Bottom Layer w8: v2(1736,-1725) 1966,-1725 2025,-1784 2025,-1944 1815,-2154 1815,-2432 v2@1837,-2454
DISP0_DAT10: J1.16 P6.18 | length 900.7
  Top Layer w8: J1.16@1789,-2371 1789,-2237 1800,-2226 1974,-2226 1991,-2209 1991,-1753 1974.79,-1736.79 P6.18
DISP0_DAT11: J1.15 P6.19 | length 1119
  Top Layer w8: v2@1754,-1748.67 v2(1755,-1748.67) P6.19@1780.71,-1748.67 ; J1.15@1792,-2533.51 1795,-2530.51 v2(1795,-2448)
  Bottom Layer w8: v2(1755,-1748.67) 1949.67,-1748.67 2007,-1806 2007,-1929 1795,-2141 v2(1795,-2448)
DISP0_DAT12: J1.14 P6.20 | length 895.8
  Top Layer w8: J1.14@1737,-2371 1737,-2222 1751,-2208 1958,-2208 1973,-2193 1973,-1771 1962.41,-1760.41 P6.20
DISP0_DAT13: J1.13 P6.21 | length 1147.3
  Top Layer w8: 1737,-2595 J1.13@1737,-2532.92 ; v2@1738,-1771.67 P6.21@1776.71,-1771.67 ; J1.13@1747.5,-2491.5 v2(1773,-2466)
  Bottom Layer w8: v2(1736,-1771) 1946,-1771 1988,-1813 1988,-1916 1773,-2131 v2@1773,-2465
DISP0_DAT14: J1.12 P6.22 | length 872
  Top Layer w8: J1.12@1688,-2358 1688,-2211 1709,-2190 1947,-2190 1955,-2182 1955,-1795 1944.03,-1784.03 P6.22
DISP0_DAT15: J1.11 P6.23 | length 1154.6
  Top Layer w8: 1688,-2591.74 J1.11@1688,-2531.92 ; J1.11 1689.2,-2477.8 1701,-2466 v2(1744,-2466) ; v2(1754,-1795.67) P6.23@1775.71,-1795.67
  Bottom Layer w8: v2@1745,-2464 1754,-2455 1754,-2123 1968,-1909 1968,-1820 1943.67,-1795.67 v2(1754,-1795.67)
DISP0_DAT16: J1.10 P6.25 | length 678.8
  Top Layer w8: J1.10 1639.2,-2267.8 1660,-2247 1660,-1831 1672,-1819 P6.25@1779,-1819
DISP0_DAT17: J1.9 P6.26 | length 839.6
  Top Layer w8: J1.9@1635.33,-2499.71 v2@1635.33,-2446 ; P6.26@1899.29,-1830.33 v4@1931.65,-1830.33
  Bottom Layer w8: v2@1636,-2446 1636,-2102 1910,-1828 v4(1932,-1828)
  other v2: 1636,-2445
DISP0_DAT18: J1.8 P6.27 | length 684.8
  Top Layer w8: J1.8 1589.2,-2260.8 1640,-2210 v2@1640,-1859 ; v2(1686.25,-1858.75) 1702,-1843 P6.27@1777.95,-1843
  Bottom Layer w8: v2(1639,-1859) 1686,-1859 v2(1686.25,-1858.75)
DISP0_DAT19: J1.7 P6.28 | length 893.7
  Top Layer w8: J1.7@1590,-2531.51 1591,-2530.51 v2(1591,-2467) ; P6.28@1899.29,-1854.33 v4@1931.65,-1854.33
  Bottom Layer w8: v2@1590,-2467 1647,-2467 1666,-2448 1666,-2104 1916,-1854 v4(1931,-1854)
DISP0_DAT20: J1.6 P6.29 | length 687.4
  Top Layer w8: J1.6 1539.2,-2275.8 1618,-2197 v2(1618,-1886) v2@1618,-1887 ; v2@1704,-1888 1725.67,-1866.33 P6.29@1770.65,-1866.33
  Bottom Layer w8: v2(1618,-1886) v2(1705,-1886)
DISP0_DAT21: J1.5 P6.30 | length 961.7
  Top Layer w8: v2(1540,-2468) 1540,-2533.51 1541,-2534.51 J1.5@1542,-2533.51 ; P6.30@1900.29,-1878.33 v4@1932.65,-1878.33
  Bottom Layer w8: v2@1541,-2466 1541,-2482 1549,-2490 1655,-2490 1695,-2450 1695,-2111 1927,-1879 v4(1931,-1879)
DISP0_DAT22: J1.4 P6.31 | length 708.2
  Top Layer w8: J1.4 1489.2,-2293.8 1595,-2188 v2@1595,-1910 ; v2(1686,-1910) 1716,-1910 1735.67,-1890.33 P6.31
  Bottom Layer w8: v2@1595,-1910 v2(1686,-1910)
  other v2: 1594,-1910
DISP0_DAT23: J1.3 P6.32 | length 1019.9
  Top Layer w8: J1.3@1489,-2530.92 v2(1489,-2464) ; P6.32@1900.29,-1902.33 v2@1932.65,-1902.33
  Bottom Layer w8: v2@1490,-2461 1490,-2465 1541,-2516 1661,-2516 1732,-2445 1732,-2110 1935,-1907 v2(1935,-1905)
DISP0_DRDY: J1.30 P6.2 | length 1042.5
  Top Layer w8: P6.2 2098.81,-1547.81 2140,-1589 J1.30@2140,-2375
DISP0_HSYNCH: J1.27 P6.5 | length 1357.3
  Top Layer w8: v2@1752.03,-1582.24 P6.5@1800.24,-1582.24 ; v2(2087,-2446) 2087,-2528.51 J1.27
  Bottom Layer w8: v2(1754,-1582) 2049,-1582 2136,-1669 2136,-2009 2147,-2020 2147,-2385 v2@2087,-2445
DISP0_VSYNCH: J1.28 P6.4 | length 1021.5
  Top Layer w8: P6.4 2085.43,-1571.43 2115,-1601 2115,-2287 2089,-2313 J1.28@2089,-2385
DLP_CTL: J1.65 R18.1 R22.2 | length 326.2
  Top Layer w10: v2(3035,-2448) 3035,-2526.51 J1.65@3037,-2528.51 ; v2(3037,-2296) R18.1@3037,-2264
  Top Layer w12: R18.1@3037,-2264 R22.2@3097,-2264
  Bottom Layer w10: v2(3035,-2448) 3035,-2298 v2(3037,-2296)
ECSPI1_CLK: J1.66
ECSPI1_CS1: J1.68
ECSPI5_CLK: J1.72
ECSPI5_CS0: J1.70
ECSPI5_MOSI: J1.67
EIM_BCLK: J1.35
EIM_CS0: J1.55
EIM_CS1: J1.56
EIM_DA0: J1.54
EIM_DA1: J1.53
EIM_DA2: J1.52
EIM_DA3: J1.51
EIM_DA4: J1.50
EIM_DA5: J1.49
EIM_DA6: J1.48
EIM_DA7: J1.47
EIM_DA8: J1.46
EIM_DA9: J1.45
EIM_DA11: J1.43
EIM_DA13: J1.41
EIM_DA15: J1.39
EIM_DATA0: J2.40
EIM_DATA1: J2.39
EIM_DATA2: J2.42
EIM_DATA3: J2.41
EIM_DATA4: J2.44
EIM_DATA5: J2.43
EIM_DATA6: J2.46
EIM_DATA7: J2.45
EIM_DATA8: J2.48
EIM_DATA9: J2.47
EIM_DATA10: J2.50
EIM_DATA11: J2.49
EIM_DATA12: J2.52
EIM_DATA13: J2.51
EIM_DATA14: J2.54
EIM_DATA15: J2.53
EIM_EB0: J1.64
EIM_EB1: J1.57
EIM_LBA: J1.62
EIM_OE: J1.58
EIM_RW: J1.60
EIM_WAIT: J1.37
GPIO3_IO10: J1.44
GPIO3_IO12: J1.42
GPIO3_IO14: J1.40
GSM_PW: R30.2 R34.2 R36.1 | length 1381.8
  Top Layer w8: v2(3122,-1965) 3387,-1700 3387,-1286 3412,-1261 v2(3475,-1261)
  Bottom Layer w8: v2(3122,-1965) 3122,-2077 3155,-2110 R30.2@3239.76,-2110 ; R34.2@3239,-2177 R30.2@3239,-2103.24 ; v2@3476.5,-1258.5 3544,-1191 R36.1@3626,-1191
GSM_RST: R31.2 R33.2 R35.1 | length 1558.5
  Top Layer w8: v2(3091,-1958) 3094,-1958 3366,-1686 3366,-1273 3404,-1235 3574,-1235
  Bottom Layer w8: v2(3091,-1958) 3073,-1976 3073,-2329 3083,-2339 R31.2@3110,-2339 ; R33.2@3110,-2406.76 R31.2@3110,-2333 ; v2@3583.24,-1236 R35.1@3624,-1236
  other v2: 3584,-1236
HDMI_CEC: J2.59
HDMI_CLK_N: J2.72
HDMI_CLK_P: J2.74
HDMI_D0_N: J2.62
HDMI_D0_P: J2.60
HDMI_D1_N: J2.68
HDMI_D1_P: J2.70
HDMI_D2_N: J2.64
HDMI_D2_P: J2.66
HDMI_HPD: J2.57
HDMI_TX_DDC_SCL: J2.58
HDMI_TX_DDC_SDA: J2.56
HPL: J2.97
HPR: J2.99
I2C3_SCL: J2.13 R20.1 | length 548.4
  Top Layer w8: R20.1@1802,-1359 v2@1802,-1317 ; v2(1802,-941) 1827,-916 J2.13@1827,-821
  Bottom Layer w8: v2@1802,-1317 v2(1802,-941)
  other v2: 1801,-1317
I2C3_SDA: J2.11 R21.1 | length 569.3
  Top Layer w8: v2(1776,-876) 1777,-875 J2.11@1777,-816 ; R21.1@1866,-1348 v2@1866,-1316
  Bottom Layer w8: v2(1776,-876) 1865,-965 v2(1865,-1316)
LED_ACT: J1.92 J5.13 | length 3073.5
  Top Layer w8: J5.13 1007.02,-2642.02 1028,-2663 3340,-2663 3375,-2628 3649,-2628 3664,-2613 3664,-2435 J1.92@3679,-2420
LED_LINK10_100: J1.91 R17.2 | length 445.8
  Top Layer w8: J1.91@3688,-2529.51 v2(3688,-2468)
  Bottom Layer w8: v2@3689,-2467 3689,-2428 3755,-2362 3932,-2362 R17.2
LED_LINK1000: J1.90 R16.2 | length 586.7
  Top Layer w8: v2(3639,-2444) J1.90@3639,-2377.38
  Bottom Layer w8: v2(3639,-2444) 3743,-2340 3896.15,-2340 3948,-2288.15 3948,-2194 R16.2
LINK_LED: Q6.2 R24.2 | length 155.8
  Top Layer w10: R24.2 Q6.2@3824.76,-1852
LVDS0_CLK_N: J2.14
LVDS0_CLK_P: J2.16
LVDS0_TX0_N: J2.30
LVDS0_TX0_P: J2.32
LVDS0_TX1_N: J2.18
LVDS0_TX1_P: J2.20
LVDS0_TX2_N: J2.26
LVDS0_TX2_P: J2.28
LVDS0_TX3_N: J2.22
LVDS0_TX3_P: J2.24
LVDS1_CLK_N: J2.33
LVDS1_CLK_P: J2.31
LVDS1_TX0_N: J2.29
LVDS1_TX0_P: J2.27
LVDS1_TX1_N: J2.23
LVDS1_TX1_P: J2.25
LVDS1_TX2_N: J2.21
LVDS1_TX2_P: J2.19
LVDS1_TX3_N: J2.17
LVDS1_TX3_P: J2.15
MIC: J2.100
MINIPCIE1V5: J2.8
MISO: P8.3 U4.16 | length 267
  Bottom Layer w8: U4.16@4126.24,-683 4307,-683 P8.3@4368,-744
MOSI: P8.2 U4.15 | length 307.3
  Bottom Layer w8: U4.15@4089,-665 4089,-644 4096,-637 P8.2@4369,-637 ; U4.15@4089.91,-691.65 U4.15@4090,-695
NetA1_1: A1.1 U3.39 | length 144
  Top Layer w35: A1.1@2390.68,-1853.32 U3.39
NetC7_1: C7.1 L1.2 U1.2 | length 280.6
  Top Layer w12: C7.1 1486,-1306 1498,-1294 1498,-1140.91 L1.2
  Top Layer w20: U1.2 1385,-1013
NetC7_2: C7.2 U1.6 | length 78.3
  Top Layer w10: U1.6 1422.4,-1223.4 C7.2
NetC14_1: C14.1 D6.K L2.1 U2.8 | length 131
  Top Layer w12: C14.1 856,-1376 875.31,-1395.31 U2.8
NetC14_2: C14.2 U2.1 | length 139.6
  Top Layer w12: U2.1 664.68,-1394.32 683,-1376 C14.2
NetC16_1: C16.1 U2.4 | length 80.9
  Top Layer w10: C16.1 622,-1669 622,-1622 U2.4@641,-1603
NetC17_1: C17.1 R13.2 | length 56
  Top Layer w12: C17.1 R13.2
NetC17_2: C17.2 C18.2 U2.6 | length 323.6
  Top Layer w10: C17.2 849,-1646 857,-1638 927,-1638 943,-1622 943,-1559 931,-1547 U2.6
  Top Layer w12: C18.2@793,-1674 C17.2
NetC19_1: C19.1 J5.5 J5.6 | length 213
  Bottom Layer w12: J5.5@818,-1916 871,-1969 C19.1@871,-2107
NetC22_1: C22.1 Q4.3 U3.11 | length 262.7
  Top Layer w8: v2@3172,-2180 3282,-2180 3290,-2172 U3.11@3290,-2057 ; U3.11@3291.89,-2038.39 U3.11@3292,-2034
  Bottom Layer w8: Q4.3@3149,-2180 v2(3171,-2180)
NetC26_1: C26.1 U4.20 | length 89
  Bottom Layer w12: U4.20@4205,-843 C26.1@4294,-843
NetD2_1: D2.1 R41.2 | length 28
  Top Layer w12: D2.1@4012,-2085 R41.2@4040,-2085
NetD2_2: D2.2 Q5.3 | length 74.4
  Top Layer w12: Q5.3@3920,-2039 3976,-2039 D2.2@3989,-2026
NetD3_A: D3.A R9.2 | length 73.8
  Top Layer w12: R9.2@1051,-808 D3.A@1051,-734.24
NetD4_1: D4.1 R42.2 | length 28
  Top Layer w12: D4.1@4014,-1917 R42.2@4042,-1917
NetD4_2: D4.2 Q6.3 | length 81
  Top Layer w12: Q6.3@3928,-1893 3956,-1893 D4.2@3993.5,-1855.5
NetD7_A: D7.A R10.1 | length 42
  Top Layer w12: D7.A@2326,-1649 R10.1@2368,-1649
NetD9_2: D9.2 R38.2 | length 44
  Bottom Layer w15: R38.2@3626,-933 D9.2@3626,-889
NetF1_1: F1.1 P4.2
NetJ1_73: J1.73 R33.1 | length 141.4
  Top Layer w8: J1.73@3239,-2495 v2(3239,-2466) ; J1.73@3240.92,-2530.66 J1.73@3241,-2533
  Bottom Layer w8: R33.1@3190,-2396 3223,-2396 3240,-2413 v2@3240,-2466
NetJ1_75: J1.75 R34.1 | length 402.6
  Top Layer w8: J1.75@3290,-2545 v2@3290,-2471.24
  Bottom Layer w8: v2(3290,-2472) 3290,-2427 3348,-2369 3348,-2211 R34.1@3317,-2180
NetJ4_2: J4.2 R4.1 | length 107
  Top Layer w10: J4.2 3709.5,-415.5 3724,-430 R4.1
NetJ4_3: J4.3 R5.1 | length 106.4
  Top Layer w10: R5.1 3665,-430 3678,-417 J4.3
NetJ5_11: J5.11 R14.1 | length 114
  Top Layer w12: R14.1@470,-2451 J5.11@584,-2451
NetJ5_12: J5.12 Q1.2 Q2.2 | length 4063.6
  Bottom Layer w10: J5.12@691.5,-2457.5 873,-2639 2283,-2639 2337,-2585 4154,-2585 4162,-2577 4162,-2366 4133.4,-2337.4 Q1.2
NetJ5_14: J5.14 R15.1 | length 107.9
  Top Layer w8: J5.14 R15.1@1214.93,-2454.07
NetP6_37: P6.37 R18.2 | length 2479.3
  Top Layer w8: R18.2@2962,-2269 R18.2
  Top Layer w10: v2(1738,-1961.2) P6.37 ; v2(1896,-1513) 2119,-1513 2170,-1564 2170,-2224 v2(2215,-2269) ; v2@2314,-2269 R18.2@2962,-2269
  Bottom Layer w10: v2(1738,-1961.2) 1738,-1842 1688,-1792 1688,-1546 1721,-1513 v2(1896,-1513) ; v2(2215,-2269) v2@2314,-2269
  other v2: 2315,-2269
NetP6_42: P6.42 R21.2 | length 647.7
  Top Layer w8: R21.2@1863,-1419 1863,-1461 1850,-1474 1850,-2004 1866.25,-2020.25 P6.42
NetP6_43: P6.43 R20.2 | length 675.2
  Top Layer w8: P6.43 1826.94,-2032.06 1832,-2027 1832,-1476 1805,-1449 R20.2@1805,-1413
NetP6_47: P6.47 R19.2 | length 1760.8
  Top Layer w8: P6.47 1814.29,-2079.31 1840,-2105.01 v2(1840,-2167)
  Bottom Layer w8: v2(1840,-2167) 1840,-2418 1861,-2439 1861,-2507 1891,-2537 2237,-2537 2282,-2492 3112,-2492 R19.2@3113,-2493
NetQ1_1: Q1.1 R16.1 | length 73.8
  Bottom Layer w8: R16.1 R16.1@3985.42,-2096.58
  Bottom Layer w10: R16.1@3985.42,-2096.58 Q1.1
NetQ2_1: Q2.1 R17.1 | length 74.3
  Bottom Layer w8: R17.1 R17.1@3986.58,-2250.58
  Bottom Layer w10: R17.1@3986.58,-2250.58 Q2.1
NetQ3_2: Q3.2 R30.1 | length 73.8
  Bottom Layer w8: R30.1@3311,-2117 Q3.2@3311,-2043.24
NetQ3_3: Q3.3 U3.10 | length 97.8
  Top Layer w8: U3.10@3247,-2048.76 v2(3247,-1971)
  Bottom Layer w8: v2@3247,-1970 Q3.3@3267,-1970
NetQ4_2: Q4.2 R31.1 | length 72.3
  Bottom Layer w8: R31.1@3180.85,-2335.67 R31.1@3181,-2337 ; R31.1@3182,-2335 Q4.2@3182,-2264.04
NetR6_2: R6.2 U1.5 | length 158.8
  Top Layer w10: R6.2 1306,-1128 1377,-1128 1385,-1136 U1.5
NetR7_2: R7.2 R8.2 U1.4 | length 135
  Top Layer w10: U1.4 1347.6,-1226.4 R8.2 R7.2
NetR11_1: R11.1 R12.2 U2.5 | length 244
  Top Layer w10: R12.2 R11.1 740,-1642 752,-1630 826,-1630 859,-1597 U2.5
NetR24_1: R24.1 U3.13 | length 137.9
  Top Layer w10: U3.13 R24.1@3599.69,-1853.32
NetR25_2: R25.2 U3.30 | length 337.4
  Top Layer w8: U3.30 2747.25,-1032.75 2775,-1005 R25.2
NetR26_2: R26.2 U3.29 | length 247.9
  Top Layer w8: U3.29 2790.56,-1074.44 2805,-1060 R26.2
NetR27_2: R27.2 U3.28 | length 120.8
  Top Layer w8: U3.28@2839,-1242.76 R27.2@2839,-1122
NetR28_1: R28.1 U3.22 | length 1657.4
  Top Layer w10: R28.1@2306,-2144 2311,-2139 2957,-2139 2971,-2125 2971,-1995.5 3247.25,-1719.25 U3.22
NetR29_1: R29.1 U3.21 | length 1784.7
  Top Layer w10: R29.1@2248,-2146 2268,-2166 2988,-2166 3007,-2147 3007,-2005 3290.56,-1721.44 U3.21
NetR32_1: R32.1 U3.20 | length 92.7
  Top Layer w12: U3.20@3462.82,-1403.43 R32.1@3555.57,-1403.43
NetR35_2: R35.2 U4.23 | length 876.2
  Bottom Layer w8: R35.2@3698,-1252 4192,-1252 4248,-1196 4248,-950 4236,-938 U4.23@4196,-938
NetR36_2: R36.2 U4.24 | length 679.5
  Bottom Layer w8: R36.2@3700,-1189 3702,-1191 4150,-1191 4171,-1170 U4.24@4171,-971
NetR38_1: R38.1 U4.2 | length 138
  Bottom Layer w12: R38.1@3689,-937 U4.2@3827,-937
NetR39_1: R39.1 U4.30 | length 331.5
  Bottom Layer w8: R39.1@3705,-1099 3953,-1099 3962,-1090 U4.30@3962,-1019.24
NetR40_1: R40.1 U4.31 | length 292.2
  Bottom Layer w8: R40.1 3762,-1029 3814,-1081 3923,-1081 3931,-1073 U4.31@3931,-1048 ; U4.31@3931.92,-1026.33 U4.31@3932,-1021
NRST_E: J2.95 K1.3 K1.4 | length 905.6
  Top Layer w10: J2.95@3877,-775 3877,-737 3894,-720 4076,-720 4140,-656 K1.3@4140,-85
ONOFF: J2.96
PCIE_RX_N: J2.75
PCIE_RX_P: J2.73
PCIE_TX_N: J2.79
PCIE_TX_P: J2.77
POR_B: D1.3 J2.35 | length 415.1
  Top Layer w8: D1.3@2124.24,-1000 2351,-1000 2376,-975 J2.35@2376,-822
PWM1_OUT: J1.1
RESET_B: D1.2 R3.1 | length 73.8
  Top Layer w8: R3.1@2040,-1113 D1.2@2040,-1039.24
RST: C25.1 P8.5 R37.1 U4.29 | length 619.3
  Top Layer w8: v2@3997,-969 4017,-949 P8.5@4375,-949
  Bottom Layer w8: R37.1@3987,-1149 C25.1 ; R37.1@3994,-1143 v2(3994,-969)
SATA_RX_N: J2.82
SATA_RX_P: J2.80
SATA_TX_N: J2.76
SATA_TX_P: J2.78
SCK: P8.4 U4.17 | length 258.1
  Bottom Layer w8: U4.17@4157.24,-749 4281,-749 P8.4@4376,-844
SD2_CD: J1.82 J3.9 R2.1 | length 607.9
  Top Layer w8: J1.82 3439.2,-2181.8 v2@3452,-2169
  Bottom Layer w8: v2(3457,-2166) 3697,-2166 3705,-2174 3746,-2174 3790,-2218 3790,-2245.12 J3.9@3799,-2254.12
SD2_CLK: J1.85 J3.5 | length 322.3
  Top Layer w8: J1.85 v2(3539.2,-2449.8) 3539.2,-2464.2
  Bottom Layer w8: v2(3539.2,-2449.8) 3622.53,-2366.47 J3.5@3622.53,-2257.36
SD2_CMD: J1.84 J3.3 R1.1 | length 216.8
  Top Layer w8: v2(3489,-2318) 3489,-2376.97 J1.84
  Bottom Layer w8: v2(3489,-2318) 3525,-2318 3535.91,-2307.09 R1.1@3535.91,-2201
SD2_DATA0: J1.88 J3.7 | length 341.4
  Top Layer w8: J1.88@3590,-2376.38 3595,-2371.38 3595,-2211 3607,-2199 v2(3699,-2199)
  Bottom Layer w8: v2(3699,-2199) 3699,-2201 3708,-2210 3708,-2250.5 3712,-2254.5 J3.7@3709.14,-2257.36
SD2_DATA1: J1.83 J3.8 | length 451.5
  Top Layer w8: J1.83 v2(3489.2,-2466)
  Bottom Layer w8: v2(3489.2,-2466) 3499.2,-2476 3548,-2476 3706,-2318 3741,-2318 3752.45,-2306.55 J3.8@3752.45,-2257.36
SD2_DATA2: J1.87 J3.1 | length 455.3
  Top Layer w8: J1.87 v2@3589.2,-2468
  Bottom Layer w8: J3.1@3449.3,-2257.36 3449.3,-2482.3 3463,-2496 3581,-2496 3589,-2488 v2(3589,-2469)
SD2_DATA3: J1.86 J3.2 | length 278.1
  Top Layer w8: v2(3494,-2199) 3532,-2199 3539.2,-2206.2 J1.86
  Bottom Layer w8: J3.2@3492.61,-2257.36 3494,-2255.97 v2(3494,-2199)
SD3_CMD: J1.77
SD3_DATA0: J1.80
SD3_DATA1: J1.74
SD3_DATA2: J1.76
SD3_DATA4: J1.79
SD3_DATA5: J1.78
SD3_DATA6: J1.81
SD3_DATA7: J1.69
SIM_CLK: P1.3 R25.1 | length 1236.5
  Top Layer w8: R25.1 3686,-1005 3769.96,-1088.96 P1.3
SIM_DAT: P1.7 R26.1 | length 1239.4
  Top Layer w8: R26.1 3634,-1060 3695,-1121 3695,-1482 3702.72,-1489.72 P1.7
SIM_RST: P1.2 R27.1 | length 1231.1
  Top Layer w8: R27.1 3600,-1116 3658,-1174 3658,-1525 3672.72,-1539.72 P1.2
STAT: R23.1 U3.12 | length 127.8
  Top Layer w10: U3.12 R23.1@3589.62,-1896.62
TEMP_STAT: J1.71 R19.1 | length 112.9
  Top Layer w8: J1.71@3190,-2529.92 v2(3190,-2449)
  Bottom Layer w8: R19.1@3190,-2481 v2(3190,-2449)
TRX0_N: J1.100 J5.2 | length 4441.7
  Top Layer w8: J1.100@3881,-2344 3881,-2317 3866,-2302 3866,-2280 3878,-2268 v2(3893,-2268)
  Bottom Layer w8: J5.2 666,-2015 666,-1469 724,-1411 3344,-1411 3893,-1960 v2(3893,-2268)
TRX0_P: J1.98 J5.1 | length 4429
  Top Layer w8: J1.98@3848,-2344 3848,-2275.37 3892.37,-2231 v2(3920,-2231)
  Bottom Layer w8: J5.1 621,-1904 650,-1875 650,-1462.37 717.37,-1395 3350.63,-1395 3909,-1953.37 3909,-2220 v2(3920,-2231)
TRX1_N: J1.96 J5.4 | length 4117.5
  Top Layer w8: v2@3774,-2171 3774,-2301 3785,-2312 J1.96@3785,-2351
  Bottom Layer w8: J5.4@771,-2008 771,-1867.63 851,-1787.63 851,-1496 898,-1449 3313.37,-1449 3772,-1907.63 v2@3772,-2165
  other v2: 3775,-2169
TRX1_P: J1.94 J5.3 | length 4144.4
  Top Layer w8: J1.94@3747,-2347 3747,-2309 3758,-2298 3758,-2184 3750,-2176 3750,-2157 3758,-2149 v2@3798,-2149
  Bottom Layer w8: J5.3@730,-1919 730,-1886 835,-1781 835,-1489.37 891.37,-1433 3320,-1433 3788,-1901 3788,-2143 v2@3795,-2150
  other v2: 3798,-2153
TRX2_N: J1.97 J5.8 | length 3592
  Top Layer w8: J1.97 3846,-2523.92 v2(3846,-2473)
  Bottom Layer w8: J5.8@954,-2030 954,-2543 1009,-2598 2272,-2598 2322,-2548 3844,-2548 3857,-2535 3857,-2484 v2(3846,-2473)
TRX2_P: J1.99 J5.7 | length 3753.9
  Top Layer w8: v2(3887,-2471) 3887,-2528.51 J1.99
  Bottom Layer w8: J5.7@927,-1929 927,-2046 938,-2057 938,-2549.63 1002.37,-2614 2278.63,-2614 2328.63,-2564 3850.63,-2564 3873,-2541.63 3873,-2485 v2(3887,-2471)
TRX3_N: J1.93 J5.10 | length 3381.5
  Top Layer w8: J1.93 3739.2,-2472.8 3747,-2465 v2(3766,-2465)
  Bottom Layer w8: J5.10 1200.41,-2020 1251.41,-2071 1251.41,-2561.04 1270.59,-2580.22 2251.41,-2580.22 2302.63,-2529 3735.37,-2529 3736.37,-2530 3749.63,-2530 3753.63,-2526 3756,-2526 3766,-2516 v2(3766,-2465) v2@3766,-2464
TRX3_P: J1.95 J5.9 | length 3496.4
  Top Layer w8: J1.95@3792,-2527.92 v2(3792,-2444)
  Bottom Layer w8: J5.9 1123.04,-1920 1267.41,-2064.37 1267.41,-2554.41 1277.22,-2564.22 2244.78,-2564.22 2296,-2513 3742,-2513 3743,-2514 3743,-2451 3750,-2444 v2(3792,-2444)
UART1_RX: J2.84 P5.1 | length 449.4
  Top Layer w10: P5.1@3301,-328 3331,-328 3387,-384 3388,-384 3577,-573 J2.84
UART1_TX: J2.86 P5.2 | length 556.3
  Top Layer w10: P5.2@3276,-234 3627,-585 J2.86
UART2_RX: J1.31 R40.2 | length 2845.6
  Top Layer w8: J1.31@2191,-2520 v2@2191,-2472 ; v2@2623,-2050 v2@2623,-1263.24
  Top Layer w10: J1.31@2188,-2536 J1.31@2188.11,-2530.69
  Bottom Layer w8: v2@2191,-2468 2191,-2419 2256,-2354 2571,-2354 2619,-2306 v2(2619,-2051) ; v2(2623,-1263) 2623,-1051 2644,-1030 R40.2@3629,-1030
  other v2: 2191,-2471
UART2_TX: J1.29 R39.2 | length 2820.4
  Top Layer w8: J1.29@2140,-2524 v2(2140,-2467) ; v2(2650,-2024) v2@2650,-1273.24
  Bottom Layer w8: v2@2140,-2466 2140,-2435 2241,-2334 2554,-2334 2587,-2301 2587,-2046 2609,-2024 v2(2650,-2024) ; v2(2651,-1272) 2651,-1104 2668,-1087 R39.2@3628,-1087
UART3_RX: J1.34 R29.2 | length 172
  Top Layer w10: J1.34 R29.2@2239.2,-2205.2
UART3_TX: J1.36 R28.2 | length 170.4
  Top Layer w10: J1.36 R28.2@2289.2,-2206.8
USB_H1_D_N: J2.91
USB_H1_D_P: J2.93
USB_H1_OC: J2.90
USB_OTG_D_N: J2.89 R4.2 | length 278.4
  Top Layer w10: v2@3724,-547 R4.2 ; J2.89@3725,-796.43 v2(3725,-740)
  Bottom Layer w10: v2@3724,-741 v2(3724,-548)
USB_OTG_D_P: J2.87 R5.2 | length 287.8
  Top Layer w10: v2(3665,-544) R5.2 ; J2.87@3678,-797.43 v2(3678,-739)
  Bottom Layer w10: v2(3665,-544) 3678,-557 v2(3678,-739) v2@3678,-742
USB_OTG_ID: J2.88 J4.4 | length 310.7
  Top Layer w8: J4.4 3646.5,-420.5 3624,-443 3624,-538 3671,-585 J2.88@3671,-638.89
USB_OTG_VBUS: C4.2 C5.2 C6.2 J2.85 J4.1 | length 745.5
  Top Layer w15: J2.85@3628,-797.43 v13(3628,-736) ; J4.1 3742.99,-359 3772,-359 3781,-368 v6(3781,-421) C5.2 C6.2 C4.2
  Bottom Layer w15: v13(3628,-736) 3628,-468 3675,-421 v6(3781,-421)
VCC5V: C11.1 C12.1 C15.1 J2.1 J2.2 J2.3 J2.4 L2.2 R6.1 R9.1 R11.2 U1.3 | length 2244.1
  Top Layer w12: R11.2 740,-1766 756,-1782 1074,-1782 1085,-1771 1085,-1311 1096,-1300 1150,-1300
  Top Layer w15: C11.1@1110,-909.76 R9.1@1110,-795
  Top Layer w100: C15.1 1134,-992 1228.58,-897.42 1489.58,-897.42 1542,-845 1542,-648 ; C15.1@1145,-1155 1183,-1193 L2.2@1183,-1519
VDD3.0: R32.2 U3.19 | length 98.9
  Top Layer w12: U3.19 R32.2@3560.74,-1451.74
VIN: P2.1 P3.1 P4.1 | length 1830.7
  Top Layer w100: P2.1@221,-2578 222,-2577 222,-1469 464,-1227 464,-913 510,-867
VSIM: P1.1 U3.27 | length 1411.7
  Top Layer w12: U3.27 2877.17,-1178.83 2891,-1165 3584,-1165 3628,-1209 3628,-1630 3635,-1637 P1.1@3765,-1637
WORK_LED: Q5.2 R23.2 | length 202.5
  Top Layer w10: R23.2 3705,-1908 3799.6,-2002.6 Q5.2
pads on no net: D1.1 J1.61 J1.63 P1.0 P1.6 P6.0 P6.34 P6.35 P6.36 P6.38 P6.39 P6.40 P6.41 P6.45 P6.46 P6.48 P6.49 P7.0 U2.3 U3.2 U3.3 U3.4 U3.5 U3.6 U3.7 U3.8 U3.9 U3.14 U3.15 U3.16 U3.17 U3.18 U3.23 U3.24 U3.25 U3.26 U3.32 U3.41 U3.42 U4.1 U4.7 U4.8 U4.9 U4.10 U4.13 U4.14 U4.19 U4.22 U4.25 U4.26 U4.27 U4.28 U4.32

## Polygon pours and split planes (outlines as drawn)
AUGND on Top Layer "Top Layer-No Net 1" (solid, remove dead copper): -229,116 -223,122 4504,122 4504,-2825 4520,-2841 4476,-2797 -196,-2797
AUGND on Bottom Layer "Top Layer-No Net 1" (solid, remove dead copper): -633,350 4919,350 4934,335 4680,81 4680,-2970 -220,-2970 -336,-2854
AUGND on Bottom Layer "Top Layer-No Net 1" (solid, remove dead copper): 3293,-1487 3369,-1563 3993,-1563 3993,-2371 4007,-2385 3879,-2257 3380,-2257

## Keep-outs
Keep-Out Layer:
  lines w8: 979,-0.15 2129,-0.15 ; 979,0 979,-553 585,-553 585,0 0,0 0,-2697 4448.82,-2697 4448.82,-0.15 2125.98,-0.15 ; 1282,-2192 1483,-2192 1543,-2132 1543,-1471 1535,-1463 1282,-1463 1282,-2192

## Other copper
Top Layer:
  rectangle net AUGND: 255,-1190 325,-1000
  rectangle net NetC14_1: 969,-1739 1052,-1366
  rectangle net +3.3V: 2567,-1493 2608,-1462
  rectangle net +3.3V: 2254,-1501 2440,-1326
  rectangle net VCC5V: 1096,-992 1179,-899
  rectangle net NetC14_1: 842,-1468 995,-1395
  rectangle net +12V: 502,-1519 601,-1357
  rectangle net NetF1_1: 808,-926 932,-602
  rectangle net VIN: 542,-742 776,-602
  rectangle net VIN: 340,-987 587,-602
  rectangle net VCC5V: 1161,-1105 1359,-903
  rectangle net NetC7_1: 1373,-1027 1551,-970
  rectangle net NetC7_1: 1474,-1209 1552,-1001
  rectangle net +3.3V: 1584,-1129 1877,-1022
  rectangle net +3.3V: 2432,-1510 2583,-1437
Bottom Layer:
  rectangle net AUGND: 260,-1195 340,-990

## Silkscreen, mask and mechanical layers (free items; w line width, h text height)
Top Overlay:
  lines w10: 4027,-524.81 1389.2,-524.81 ccw(c1389.2,-662.61) 1251.41,-662.61 1251.41,-2513 ccw(c1389.2,-2513) 1389.2,-2650.8 4027,-2650.8 ccw(c4027,-2513) 4164.8,-2513 4164.8,-662.61 ; 4027.2,-524.81 cw(c4027.2,-662.61) 4165,-662.61
  text "TX" at 3200,-265 h60 r90
  text "RX" at 3205,-365 h60 r90
  text "MO" at 4295,-680 h60 r90
  text "MI" at 4295,-780 h60 r90
  text "CK" at 4295,-885 h60 r90
  text "RS" at 4295,-985 h60 r90
Bottom Overlay:
  text "+12" at 415,-2655 h60 r90

## Text inside footprints (layer, text, board x,y; h text height)
C20: Top Overlay "+" at 2375,-1411 h59.06 r90
J4: Top Overlay "G" at 3537,-423 h30; Top Overlay "V" at 3798,-423 h30